# Altium PCB MainBoard4.PcbDoc
Units mm, origin at the board's own origin, x right, y up, seen from the top; angles counter-clockwise.
Board outline 135.12 x 80.25 mm, 2 copper layers (Top Layer, Bottom Layer); 81 components, 30 nets, 420 pads, 76 vias.
Unrouted connection lines stored in the file: 44.
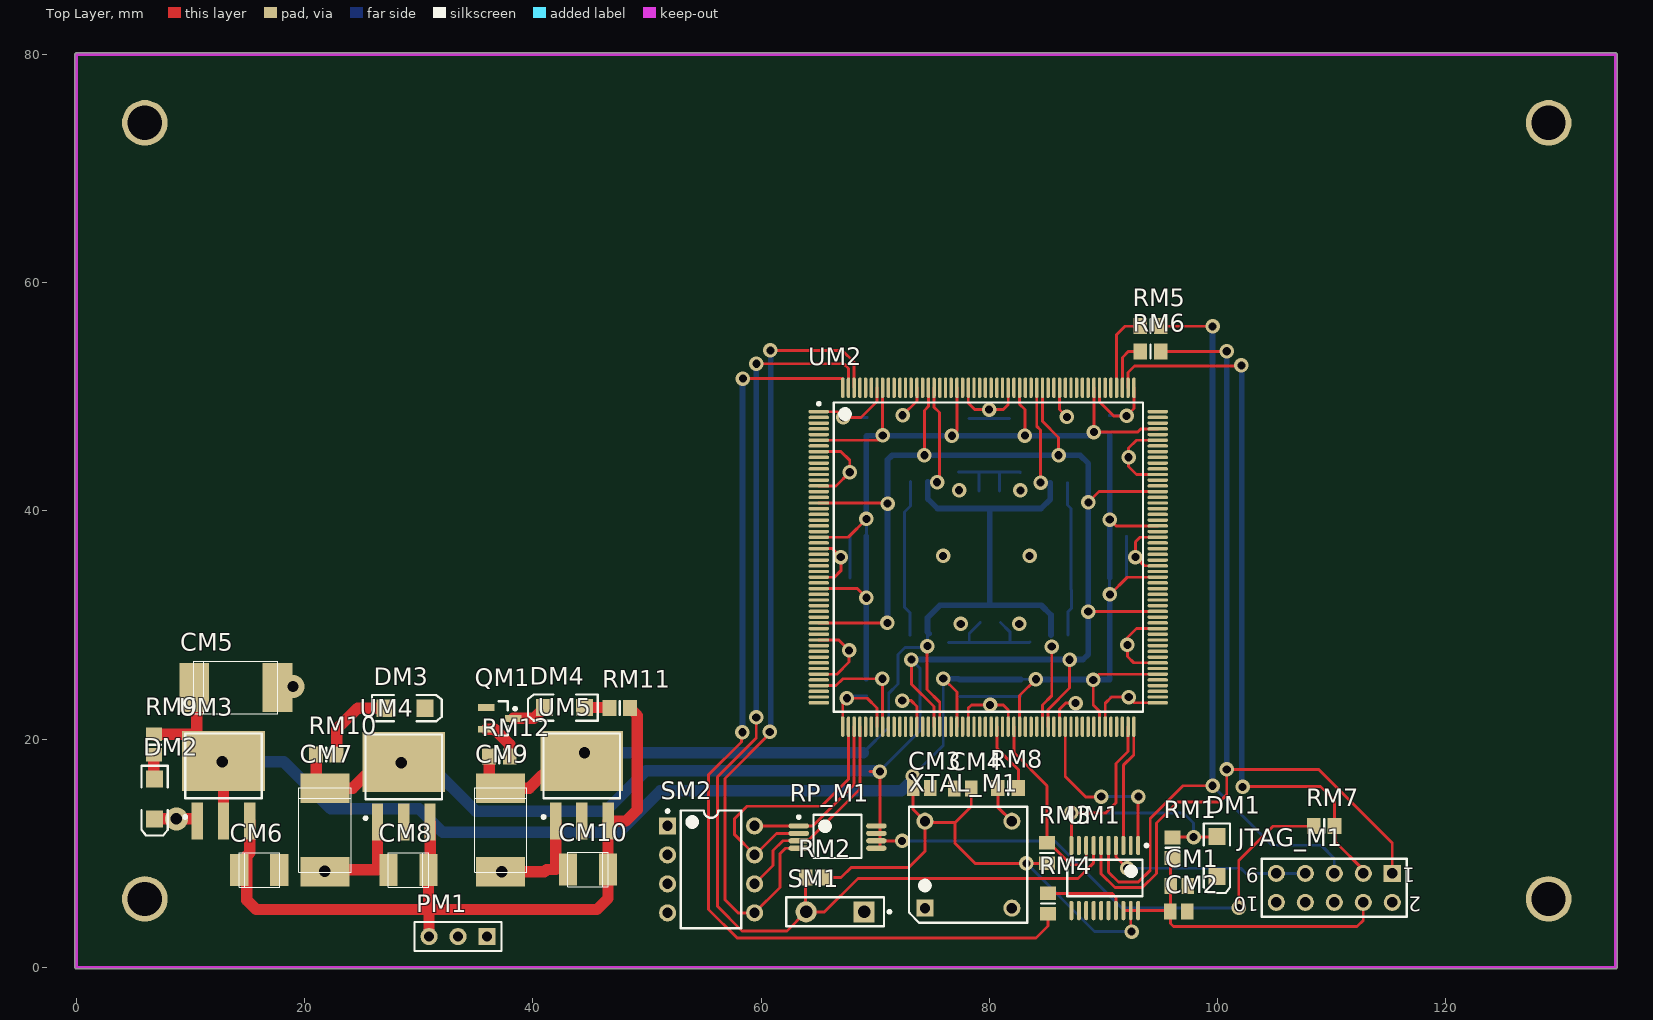
[diagram p0: Top Layer view]
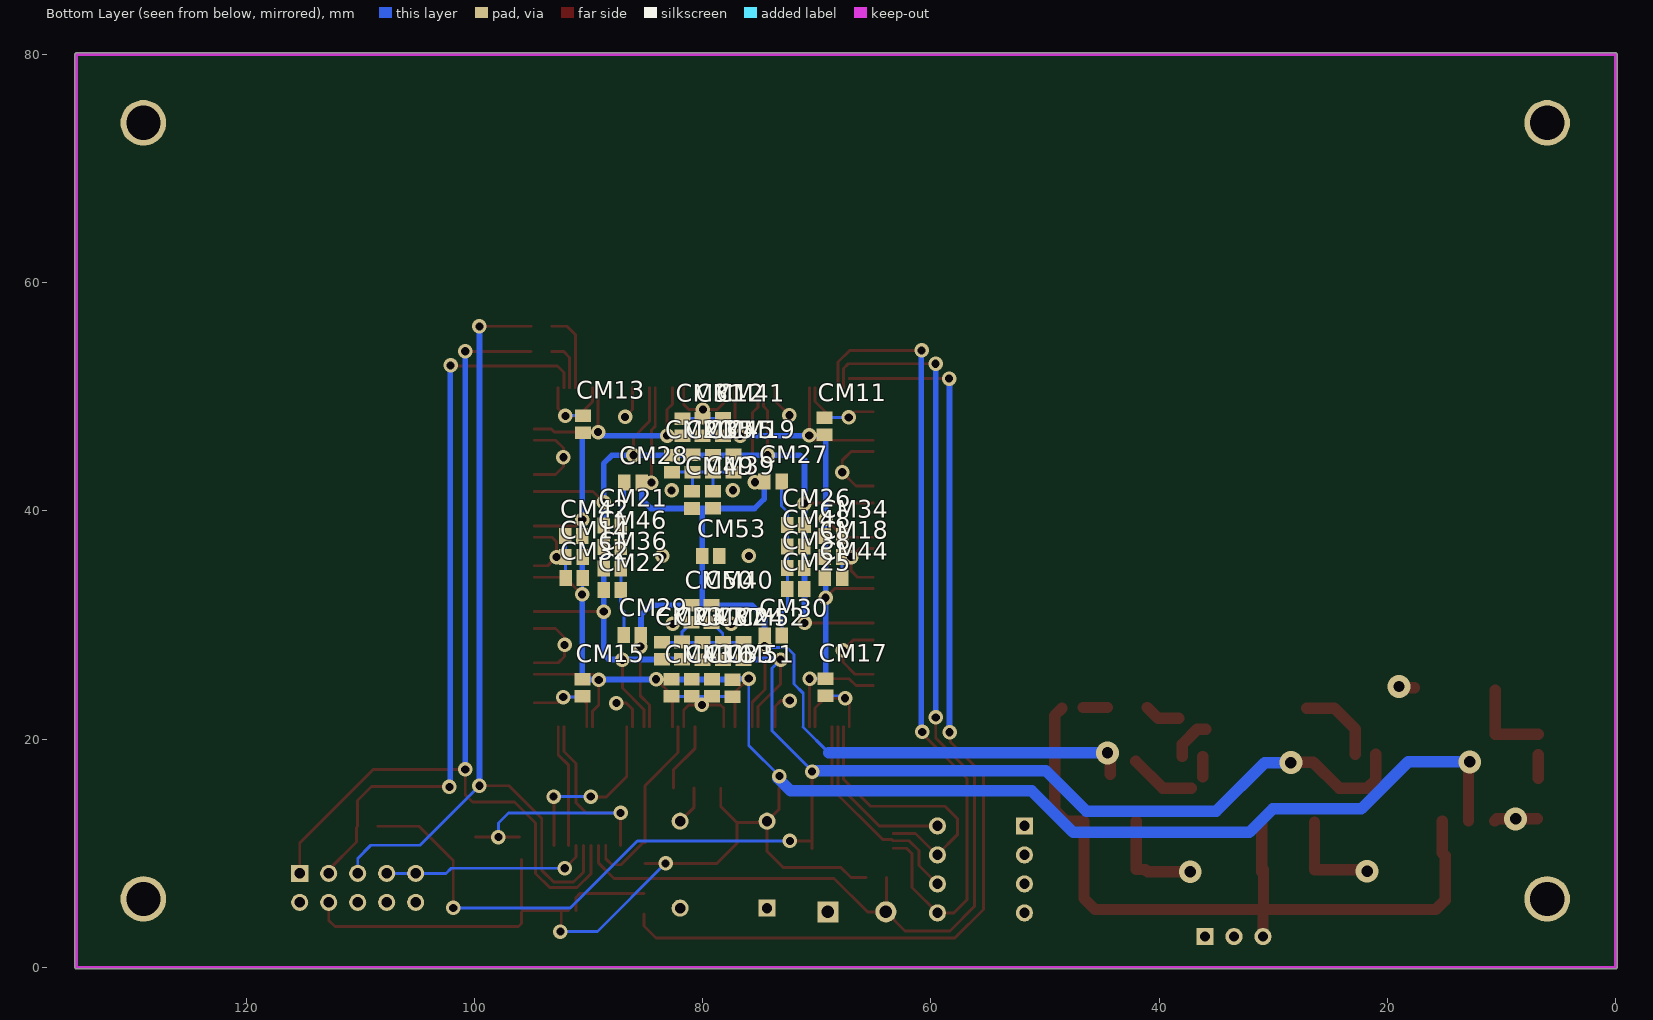
[diagram p1: Bottom Layer view, seen from below]

## Layer stack, top to bottom
Top Layer: signal copper 0.0356
Dielectric: dielectric 0.32, FR-4, Dk 4.8
Bottom Layer: signal copper 0.0356

## Board outline
0,-0.127 cw(c0,0) -0.127,0 -0.127,80 cw(c0,80) 0,80.127 134.87,80.127 cw(c134.87,80) 134.997,80 134.997,0 cw(c134.87,0) 134.87,-0.127

## Design rules (kind name [scope] priority, off if disabled: settings)
Clearance Clearance_1 [All] p1: gap=0.25
Clearance [All] p2 off: gap=0.25
PolygonConnect [All] p1: connectstyle=Relief reliefconductorwidth=0.254 reliefentries=4 polygonreliefangle="90 Angle" airgapwidth=0.254
RoutingVias [All] p1: holewidth=0.711 width=1.2 viastyle="Through Hole" minholewidth=0.711 minwidth=1.2 maxholewidth=1 maxwidth=2
SolderMaskExpansion [All] p1: expansion=0.102
Width [All] p1: maxlimit=0.254 minlimit=0.254 preferedwidth=0.254
28 further rules are at their usual default settings.

## Classes and differential pairs
component class Supply: CM5 CM6 CM7 CM8 CM9 CM10 DM2 DM3 DM4 PM1 QM1 RM9 RM10 RM11 RM12 U3 U4 U5 UM3 UM4 UM5
component class PowerGnd: CM11 CM12 CM13 CM14 CM15 CM16 CM17 CM18 CM19 CM20 CM21 CM22 CM23 CM24 CM25 CM26 CM27 CM28 CM29 CM30 CM31 CM32 CM33 CM34 CM35 CM36 CM37 CM38 CM39 CM40 CM41 CM42 CM43 CM44 CM45 CM46 CM47 CM48 CM49 CM50 CM51 CM52 CM53
component class BaseCircuit: CM1 CM2 CM3 CM4 DM1 JTAG_M1 RM1 RM2 RM3 RM4 RM5 RM6 RM7 RM8 RP_M1 SM1 SM2 U2 UM1 XTAL_M1
component class Banks: UM2

## Components (designator, comment, footprint, x,y, rotation, side; value= is the part's Value field where it differs from the comment)
CM1 "Cap" C0805 96.63,7.14 r180 top
CM2 "Cap" C0805 96.58,4.89 r180 top
CM3 "Cap" C0805 74.07,15.71 r180 top
CM4 "Cap" C0805 77.66,15.66 r0 top
CM5 "Cap Pol3" "SIZE D" 13.97,24.52 r0 top
CM6 "Cap Pol3" "SIZE B" 16.03,8.53 r0 top
CM7 "Cap Pol3" "SIZE D" 21.78,12.04 r270 top
CM8 "Cap Pol3" "SIZE B" 29.1,8.54 r180 top
CM9 "Cap Pol3" "SIZE D" 37.18,12.04 r270 top
CM10 "Cap Pol3" "SIZE B" 44.83,8.58 r180 top
CM11 "Cap" C0805 69.33,47.41 r270 bottom
CM12 "Cap" C0805 80,47.35 r270 bottom
CM13 "Cap" C0805 90.5,47.6 r270 bottom
CM14 "Cap" C0805 91.27,35.95 r180 bottom
CM15 "Cap" C0805 90.51,24.51 r90 bottom
CM16 "Cap" C0805 80.95,24.5 r90 bottom
CM17 "Cap" C0805 69.22,24.55 r90 bottom
CM18 "Cap" C0805 68.53,35.95 r0 bottom
CM19 "Cap" C0805 77.3,44.15 r90 bottom
CM20 "Cap" C0805 82.7,44.13 r90 bottom
CM21 "Cap" C0805 87.91,38.73 r0 bottom
CM22 "Cap" C0805 87.93,33.08 r0 bottom
CM23 "Cap" C0805 83.55,27.75 r270 bottom
CM24 "Cap" C0805 78.23,27.73 r270 bottom
CM25 "Cap" C0805 71.83,33.15 r180 bottom
CM26 "Cap" C0805 71.82,38.75 r180 bottom
CM27 "Cap" C0805 73.83,42.56 r0 bottom
CM28 "Cap" C0805 86.1,42.47 r180 bottom
CM29 "Cap" C0805 86.15,29.13 r180 bottom
CM30 "Cap" C0805 73.81,29.1 r0 bottom
CM31 "Cap" C0805 81.77,47.34 r270 bottom
CM32 "Cap" C0805 91.26,34.13 r180 bottom
CM33 "Cap" C0805 79.17,24.5 r90 bottom
CM34 "Cap" C0805 68.53,37.79 r0 bottom
CM35 "Cap" C0805 80.89,44.15 r90 bottom
CM36 "Cap" C0805 87.92,34.97 r0 bottom
CM37 "Cap" C0805 80,27.72 r270 bottom
CM38 "Cap" C0805 71.83,35.01 r180 bottom
CM39 "Cap" C0805 79.09,40.99 r270 bottom
CM40 "Cap" C0805 79.2,30.97 r90 bottom
CM41 "Cap" C0805 78.22,47.35 r270 bottom
CM42 "Cap" C0805 91.28,37.78 r180 bottom
CM43 "Cap" C0805 82.73,24.51 r90 bottom
CM44 "Cap" C0805 68.53,34.13 r0 bottom
CM45 "Cap" C0805 79.1,44.14 r90 bottom
CM46 "Cap" C0805 87.93,36.84 r0 bottom
CM47 "Cap" C0805 81.79,27.76 r270 bottom
CM48 "Cap" C0805 71.83,36.88 r180 bottom
CM49 "Cap" C0805 80.92,40.96 r270 bottom
CM50 "Cap" C0805 80.97,30.98 r90 bottom
CM51 "Cap" C0805 77.38,24.47 r90 bottom
CM52 "Cap" C0805 76.43,27.72 r270 bottom
CM53 "Cap" C0805 79.28,36.06 r0 bottom
DM1 "LED2" 3.2X1.6X1.1 99.93,9.71 r270 top
DM2 "LED2" 3.2X1.6X1.1 6.86,14.76 r270 top
DM3 "LED2" 3.2X1.6X1.1 28.81,22.71 r0 top
DM4 "LED2" 3.2X1.6X1.1 42.78,22.77 r180 top
JTAG_M1 "Header 5X2" HDR2X5 115.3,8.24 r180 top
PM1 "Header 3" HDR1X3 35.98,2.7 r180 top
QM1 "BC847B" SOT23_M 37.09,21.82 r0 top
RM1 "Res2" 6-0805_N 96.03,10.49 r270 top
RM2 "Res2" 6-0805_N 64.8,7.87 r0 top
RM3 "Res2" 6-0805_N 85.06,10.02 r270 top
RM4 "Res2" 6-0805_N 85.14,5.59 r90 top
RM5 "Res2" 6-0805_N 94.12,56.18 r180 top
RM6 "Res2" 6-0805_N 94.12,53.96 r180 top
RM7 "Res2" 6-0805_N 109.33,12.37 r180 top
RM8 "Res2" 6-0805_N 81.64,15.72 r0 top
RM9 "Res2" 6-0805_N 6.78,19.52 r270 top
RM10 "Res2" 6-0805_N 21.9,18.66 r0 top
RM11 "Res2" 6-0805_N 47.61,22.71 r0 top
RM12 "Res2" 6-0805_N 37.06,18.48 r0 top
RP_M1 "ResPack4" SSOP8 67.13,11.58 r0 top
SM1 "SW-PB" SPST-2 66.48,4.87 r180 top
SM2 "SW-DIP4" DIP-8 55.61,8.59 r0 top
UM1 "XCF04SVO20C" VO20_N 90.11,7.83 r270 top
UM2 "XC3S400-4PQ208C" PQ208_N 79.9,35.94 r0 top
UM3 "AMS1117-3V3" TO-252 12.88,16.14 r90 top
UM4 "AMS1117-2V5" TO-252 28.68,16.04 r90 top
UM5 "FAN1112" TO-252 44.28,16.14 r90 top
XTAL_M1 "XTAL_OSC" XTAL_HALF 78.16,9 r90 top

## Footprints (in the part's own frame and the unit in brackets; to place one, negate y for a bottom-side part, rotate by r counter-clockwise, add the part's x,y. Pads: shape width x height; smd on the part's side, far side on the other; paste and mask are expansions set on the pad)
3.2X1.6X1.1 [mm] "SMT LED; 2 Flat Leads"
  rect 1.5x1.5 smd: 1(-1.75,0) 2(1.75,0)
  silkscreen extent -2.9,-1.15 3.2,1.15
6-0805_N [mm] "Chip Resistor, Body 2.0x1.2mm, IPC Medium Density"
  rect 1.2x1.4 smd: 1(-0.9,0) 2(0.9,0)
  silkscreen extent 0,-0.6 0,0.6, body extent -1.07,-0.7 1.07,0.7, height 0.7
C0805 [mm] "Chip Capacitor, Body 2.0x1.3mm, IPC High Density"
  rect 1.1x1.4 smd: 1(-0.75,0) 2(0.75,0)
  body extent -1.1,-0.72 1.1,0.72, height 1.4
DIP-8 [mm] "DIP; 8 Leads; Row Spacing 7.62 mm; Pitch 2.54 mm"
  rect 1.5x1.5 hole 0.9: 1(-3.81,3.81)
  round 1.5 hole 0.9: 2(-3.81,1.27) 3(-3.81,-1.27) 4(-3.81,-3.81) 5(3.81,-3.81) 6(3.81,-1.27) 7(3.81,1.27) 8(3.81,3.81)
  silkscreen extent -3.93,-5.15 2.65,5.23, body extent -3.6,-5.15 3.6,5.15, height 5.08
HDR1X3 [mm] "Connector; Header; 3 Position"
  rect 1.5x1.5 hole 0.9: 1(0,0)
  round 1.5 hole 0.9: 2(2.54,0) 3(5.08,0)
  silkscreen extent -1.27,-1.27 6.35,1.27
HDR2X5 [mm] "Connector; Header; 5x2 Position"
  rect 1.5x1.5 hole 0.9: 1(0,0)
  round 1.5 hole 0.9: 2(0,2.54) 3(2.54,0) 4(2.54,2.54) 5(5.08,0) 6(5.08,2.54) 7(7.62,0) 8(7.62,2.54) 9(10.16,0) 10(10.16,2.54)
  silkscreen extent -1.27,-1.27 11.43,3.81
PQ208_N [mm] "Shrink QFP, 208-Leads, Body 28x28mm, Pitch 0.5mm, IPC Medium Density"
  oval 1.8x0.3 smd: 1(-14.85,12.75) 2(-14.85,12.25) 3(-14.85,11.75) 4(-14.85,11.25) 5(-14.85,10.75) 6(-14.85,10.25) 7(-14.85,9.75) 8(-14.85,9.25) 9(-14.85,8.75) 10(-14.85,8.25) 11(-14.85,7.75) 12(-14.85,7.25) 13(-14.85,6.75) 14(-14.85,6.25) 15(-14.85,5.75) 16(-14.85,5.25) 17(-14.85,4.75) 18(-14.85,4.25) 19(-14.85,3.75) 20(-14.85,3.25) 21(-14.85,2.75) 22(-14.85,2.25) 23(-14.85,1.75) 24(-14.85,1.25) 25(-14.85,0.75) 26(-14.85,0.25) 27(-14.85,-0.25) 28(-14.85,-0.75) 29(-14.85,-1.25) 30(-14.85,-1.75) 31(-14.85,-2.25) 32(-14.85,-2.75) 33(-14.85,-3.25) 34(-14.85,-3.75) 35(-14.85,-4.25) 36(-14.85,-4.75) 37(-14.85,-5.25) 38(-14.85,-5.75) 39(-14.85,-6.25) 40(-14.85,-6.75) 41(-14.85,-7.25) 42(-14.85,-7.75) 43(-14.85,-8.25) 44(-14.85,-8.75) 45(-14.85,-9.25) 46(-14.85,-9.75) 47(-14.85,-10.25) 48(-14.85,-10.75) 49(-14.85,-11.25) 50(-14.85,-11.75) 51(-14.85,-12.25) 52(-14.85,-12.75) 105(14.85,-12.75) 106(14.85,-12.25) 107(14.85,-11.75) 108(14.85,-11.25) 109(14.85,-10.75) 110(14.85,-10.25) 111(14.85,-9.75) 112(14.85,-9.25) 113(14.85,-8.75) 114(14.85,-8.25) 115(14.85,-7.75) 116(14.85,-7.25) 117(14.85,-6.75) 118(14.85,-6.25) 119(14.85,-5.75) 120(14.85,-5.25) 121(14.85,-4.75) 122(14.85,-4.25) 123(14.85,-3.75) 124(14.85,-3.25) 125(14.85,-2.75) 126(14.85,-2.25) 127(14.85,-1.75) 128(14.85,-1.25) 129(14.85,-0.75) 130(14.85,-0.25) 131(14.85,0.25) 132(14.85,0.75) 133(14.85,1.25) 134(14.85,1.75) 135(14.85,2.25) 136(14.85,2.75) 137(14.85,3.25) 138(14.85,3.75) 139(14.85,4.25) 140(14.85,4.75) 141(14.85,5.25) 142(14.85,5.75) 143(14.85,6.25) 144(14.85,6.75) 145(14.85,7.25) 146(14.85,7.75) 147(14.85,8.25) 148(14.85,8.75) 149(14.85,9.25) 150(14.85,9.75) 151(14.85,10.25) 152(14.85,10.75) 153(14.85,11.25) 154(14.85,11.75) 155(14.85,12.25) 156(14.85,12.75)
  oval 0.3x1.8 smd: 53(-12.75,-14.85) 54(-12.25,-14.85) 55(-11.75,-14.85) 56(-11.25,-14.85) 57(-10.75,-14.85) 58(-10.25,-14.85) 59(-9.75,-14.85) 60(-9.25,-14.85) 61(-8.75,-14.85) 62(-8.25,-14.85) 63(-7.75,-14.85) 64(-7.25,-14.85) 65(-6.75,-14.85) 66(-6.25,-14.85) 67(-5.75,-14.85) 68(-5.25,-14.85) 69(-4.75,-14.85) 70(-4.25,-14.85) 71(-3.75,-14.85) 72(-3.25,-14.85) 73(-2.75,-14.85) 74(-2.25,-14.85) 75(-1.75,-14.85) 76(-1.25,-14.85) 77(-0.75,-14.85) 78(-0.25,-14.85) 79(0.25,-14.85) 80(0.75,-14.85) 81(1.25,-14.85) 82(1.75,-14.85) 83(2.25,-14.85) 84(2.75,-14.85) 85(3.25,-14.85) 86(3.75,-14.85) 87(4.25,-14.85) 88(4.75,-14.85) 89(5.25,-14.85) 90(5.75,-14.85) 91(6.25,-14.85) 92(6.75,-14.85) 93(7.25,-14.85) 94(7.75,-14.85) 95(8.25,-14.85) 96(8.75,-14.85) 97(9.25,-14.85) 98(9.75,-14.85) 99(10.25,-14.85) 100(10.75,-14.85) 101(11.25,-14.85) 102(11.75,-14.85) 103(12.25,-14.85) 104(12.75,-14.85) 157(12.75,14.85) 158(12.25,14.85) 159(11.75,14.85) 160(11.25,14.85) 161(10.75,14.85) 162(10.25,14.85) 163(9.75,14.85) 164(9.25,14.85) 165(8.75,14.85) 166(8.25,14.85) 167(7.75,14.85) 168(7.25,14.85) 169(6.75,14.85) 170(6.25,14.85) 171(5.75,14.85) 172(5.25,14.85) 173(4.75,14.85) 174(4.25,14.85) 175(3.75,14.85) 176(3.25,14.85) 177(2.75,14.85) 178(2.25,14.85) 179(1.75,14.85) 180(1.25,14.85) 181(0.75,14.85) 182(0.25,14.85) 183(-0.25,14.85) 184(-0.75,14.85) 185(-1.25,14.85) 186(-1.75,14.85) 187(-2.25,14.85) 188(-2.75,14.85) 189(-3.25,14.85) 190(-3.75,14.85) 191(-4.25,14.85) 192(-4.75,14.85) 193(-5.25,14.85) 194(-5.75,14.85) 195(-6.25,14.85) 196(-6.75,14.85) 197(-7.25,14.85) 198(-7.75,14.85) 199(-8.25,14.85) 200(-8.75,14.85) 201(-9.25,14.85) 202(-9.75,14.85) 203(-10.25,14.85) 204(-10.75,14.85) 205(-11.25,14.85) 206(-11.75,14.85) 207(-12.25,14.85) 208(-12.75,14.85)
  silkscreen extent -14.97,-13.55 13.55,13.57, body extent -14,-14 14,14, height 4.1
"SIZE B" [mm] "Size B SMD tantalium capacitor"
  rect 1.6x2.8 smd: 1(-1.75,0) 2(1.75,0)
  silkscreen extent -1.78,-1.52 1.78,1.52, body extent -1.71,-1.52 1.71,1.52, height 1.3
"SIZE D" [mm] "Size D SMD tantalium capacitor"
  rect 2.6x4.3 smd: 1(-3.65,0) 2(3.65,0)
  silkscreen extent -3.68,-2.29 3.68,2.29, body extent -3.68,-2.29 3.68,2.29, height 1.3
SOT23_M [mm] "SOT23, 3-Leads, Body 2.9x1.3mm, Pitch 0.95mm, Lead Span 2.3mm - Reverse Pinning, IPC Low Density"
  rect 1.45x0.6 smd: 1(1.175,0) 2(-1.175,-0.95) 3(-1.175,0.95)
  silkscreen extent -0.1,-1.5 1.48,1.5, body extent -0.7,-1.5 0.7,1.5, height 1.1
SPST-2 [mm] "Switch; 2 Leads"
  rect 1.85x1.85 hole 1.1: 1(-2.54,0)
  round 1.85 hole 1.1: 2(2.54,0)
  silkscreen extent -4.89,-1.27 4.28,1.27
SSOP8 [mm]
  oval 1.8x0.45 smd: 1(-3.835,0.814) 2(-3.835,0.164) 3(-3.835,-0.486) 4(-3.835,-1.136) 5(2.965,-1.136) 6(2.965,-0.486) 7(2.965,0.164) 8(2.965,0.814)
  silkscreen extent -3.96,-2 1.67,1.79, body extent -3.14,-1.96 2.26,1.79, height 2
TO-252 [mm]
  rect 3.25x1 smd: 1(-3.309,2.292) 2(-3.309,-0.008) 3(-3.309,-2.308)
  rect 5.25x7.25 smd: 4(1.941,-0.008)
  silkscreen extent -3.09,-3.36 4.36,3.47, body extent -1.86,-3.82 4.87,3.8, height 1.7
VO20_N [mm] "TSOP, 20-Leads, Body 6.5x4.4mm, Pitch 0.65mm, IPC Medium Density"
  oval 1.7x0.35 smd: 1(-2.85,2.925) 2(-2.85,2.275) 3(-2.85,1.625) 4(-2.85,0.975) 5(-2.85,0.325) 6(-2.85,-0.325) 7(-2.85,-0.975) 8(-2.85,-1.625) 9(-2.85,-2.275) 10(-2.85,-2.925) 11(2.85,-2.925) 12(2.85,-2.275) 13(2.85,-1.625) 14(2.85,-0.975) 15(2.85,-0.325) 16(2.85,0.325) 17(2.85,0.975) 18(2.85,1.625) 19(2.85,2.275) 20(2.85,2.925)
  silkscreen extent -2.97,-3.3 1.6,3.78, body extent -2.25,-3.3 2.25,3.3, height 1.2
XTAL_HALF [mm] "NTK XTAL Oscillator Half size (qubic)"
  rect 1.5x1.5 hole 0.9: 1(-3.81,3.81)
  round 1.5 hole 0.9: 2(-3.81,-3.81) 3(3.81,-3.81) 4(3.81,3.81)
  silkscreen extent -5.08,-5.15 5.08,5.21, body extent -5.08,-5.15 5.08,5.15, height 5.08

## Part data
CM1 CM2 CM3 CM4 CM11 CM12 CM13 CM14 CM15 CM16 CM17 CM18 CM19 CM20 CM21 CM22 CM23 CM24 CM25 CM26 CM27 CM28 CM29 CM30 CM31 CM32 CM33 CM34 CM35 CM36 CM37 CM38 CM39 CM40 CM41 CM42 CM43 CM44 CM45 CM46 CM47 CM48 CM49 CM50 CM51 CM52 CM53: "Capacitor"
CM5 CM6 CM7 CM8 CM9 CM10: "Polarized Capacitor (Surface Mount)"
DM1 DM2 DM3 DM4: "Typical RED, GREEN, YELLOW, AMBER GaAs LED"
JTAG_M1: "Header, 5-Pin, Dual row"
PM1: "Header, 3-Pin"
QM1: library part NPN, "NPN Bipolar Transistor"
RM1 RM2 RM3 RM4 RM5 RM6 RM7 RM8 RM9 RM10 RM11 RM12: "Resistor"
SM1: "Switch"
SM2: "DIP Switch"
UM1: "XCF00S Series, Platform Flash In-System Programmable Configuration 3.3V PROM, 20-Pin TSOP, 4-Megabit, Commercial Grade"
UM2: "Spartan-3 1.2V FPGA, 141 User I/Os, 208-Pin PQFP, Standard Performance, Commercial Grade"
UM3 UM4 UM5: library part AMS1117-3.3V

## Free pads (board coordinates)
  round 4 hole 3: 0(6,6) 0(6,74) 0(129,6) 0(129,74)

## Via types
v1: diameter 1.27, hole 0.711, Top Layer to Bottom Layer, 69 vias
v2: diameter 2, hole 1, Top Layer to Bottom Layer, 7 vias

## Nets (pads, with @x,y where several pads share a name; then routed paths per layer and width w, separated by ;. In a path a pad name is that pad's centre, name@x,y a point inside that pad or via, vN(x,y) a via of type N, cw(c..) or ccw(c..) an arc to the next point about the centre after c; other vN are vias at no path point)
1V2: CM9.1 CM27.2 CM28.2 CM29.2 CM30.2 CM39.2 CM40.2 CM49.2 CM50.2 CM53.2 RM12.1 UM2.70 UM2.88 UM2.174 UM2.192 UM5.2 UM5.4 | length 117.7
  Top Layer w0.254: v1@74.54,27.8 74.54,24.35 75.65,23.24 UM2.70 ; UM2.192 75.15,49.08 75.62,48.61 75.62,42.71 v1(75.42,42.51) ; UM2.174 84.15,47.41 84.48,47.08 v1(84.48,42.48) ; UM2.88 84.65,22.99 85.46,23.8 v1(85.46,28.11)
  Top Layer w1: CM9.1@36.16,16.71 RM12.1 ; CM9.1 39.67,15.69 UM5.4@42.061,18.081 ; UM5.4@44.288,16.94 UM5.4
  Bottom Layer w0.254: 68.95,18.812 71.21,21.072 ; 71.18,21.142 71.18,24.02 71.98,24.82 71.98,27.41 72.593,28.023 74.433,28.023 v1(74.56,28.15) CM30.2 ; CM27.2@74.61,42.55 74.59,42.55 CM27.2 v1@75.37,42.56 ; v1(84.48,42.48) 85.33,42.48 CM28.2@85.34,42.47
  Bottom Layer w0.5: CM27.2@74.61,42.55 74.61,41.05 75.45,40.21 CM39.2@79.09,40.21 ; CM30.2@74.705,29.245 74.57,29.38 74.57,30.64 75.66,31.73 CM50.2 84.55,31.73 85.39,30.89 CM29.2@85.39,29.13 ; CM39.2 79.12,40.21 CM49.2 84.53,40.21 85.34,41.02 CM28.2@85.34,42.47 ; 80.03,31.78 CM53.2 80.03,40.12
  Bottom Layer w1: v2@44.44,18.79 68.95,18.812
  other v2: 44.52,18.8
2V5: CM7.1 CM19.2 CM20.2 CM21.2 CM22.2 CM23.2 CM24.2 CM25.2 CM26.2 CM35.2 CM36.2 CM37.2 CM38.2 CM45.2 CM46.2 CM47.2 CM48.2 CM52.2 RM7.2 RM10.1 RP_M1.5 RP_M1.6 RP_M1.7 RP_M1.8 UM2.17 UM2.38 UM2.69 UM2.89 UM2.121 UM2.142 UM2.173 UM2.193 UM4.2 UM4.4 | length 236.4
  Top Layer w0.25: 69.53,17.16 70.4,17.16 RP_M1.5@70.4,10.42
  Top Layer w0.254: UM2.38 v1(71.06,30.19) ; UM2.17 71.03,40.69 v1(71.08,40.64) ; RP_M1.6@70.65,11.08 v1(72.35,11.08) ; v1(73.16,26.97) 73.16,24.84 75.15,22.85 UM2.69 ; v1(74.31,44.88) 74.31,48.8 74.65,49.14 UM2.193 ; UM2.173 84.65,47.85 86.06,46.44 v1(86.06,44.88) ; UM2.89 85.15,22.59 87.03,24.47 v1(87.03,26.96) ; v1(88.66,31.18) 88.67,31.19 UM2.121 ; v1(88.67,40.75) 89.61,41.69 UM2.142 ; v1(101.85,5.21) 101.85,9.37 104.85,12.37 RM7.2
  Top Layer w1: RM10.1 21,16.47 CM7.1 24.2,15.69 26.491,17.981 UM4.4 UM4.4@28.688,17.94
  Bottom Layer w0.254: v1@70.41,17.23 71.27,18.09 73.92,20.74 73.92,26.21 v1(73.16,26.97) ; v1(72.35,11.08) 85.72,11.08 91.59,5.21 v1(101.85,5.21)
  Bottom Layer w0.5: v1@71.08,30.19 CM25.2 CM38.2 CM48.2 v1(71.08,40.64) 71.08,44.48 71.48,44.88 CM20.2 87.95,44.88 88.67,44.16 v1(88.67,40.75) ; v1(73.16,26.97) CM52.2 CM37.2 88.2,26.97 88.66,27.43 v1(88.66,31.18) CM21.2 v1@88.66,40.75
  Bottom Layer w1: v2(28.45,17.94) 30.75,17.94 35.01,13.68 46.37,13.68 49.92,17.23 v1@70.41,17.23
  other v1: 70.41,17.16
3V3: CM1.2 CM2.2 CM3.2 CM4.2 CM5.1 CM11.2 CM12.2 CM13.2 CM14.2 CM15.2 CM16.2 CM17.2 CM18.2 CM31.2 CM32.2 CM33.2 CM34.2 CM41.2 CM42.2 CM43.2 CM44.2 CM51.2 JTAG_M1.4 RM1.2 RM2.2 RM3.2 RM9.1 UM1.18 UM1.19 UM1.20 UM2.6 UM2.23 UM2.32 UM2.49 UM2.60 UM2.73 UM2.84 UM2.98 UM2.110 UM2.127 UM2.136 UM2.153 UM2.164 UM2.177 UM2.188 UM2.201 UM3.2 UM3.4 XTAL_M1.4 | length 320.7
  Top Layer w0.254: UM2.49 66.57,24.69 67.17,25.29 v1(70.62,25.29) 70.65,25.26 UM2.60 ; UM2.32 68.42,33.19 v1(69.22,32.39) ; UM2.23 67.63,37.69 v1(69.23,39.29) ; UM2.6 70.21,46.19 70.65,46.63 UM2.201 ; RM2.2 67.01,7.87 67.89,8.75 72.93,8.75 74.35,10.17 XTAL_M1.4 ; CM3.2 73.32,13.84 XTAL_M1.4 ; XTAL_M1.4@73.85,12.81 XTAL_M1.4 ; v1(75.96,25.31) 77.15,24.12 UM2.73 ; v1(76.72,46.58) 77.15,47.01 UM2.188 ; CM4.2 78.41,14.1 77,12.69 ; UM2.84 82.65,23.82 v1(84.08,25.25) ; UM2.177 82.65,49.35 83.11,48.89 v1(83.11,46.59) ; RM3.2 v1(83.24,9.12) 78.73,9.12 77,10.85 77,12.69 ; UM2.164 v1(89.15,46.91) 93,46.91 93.28,47.19 UM2.153 ; UM2.98 89.65,22.44 89.1,22.99 v1(89.1,25.19) 89.6,25.69 UM2.110 ; v1(90.55,39.23) 91.09,38.69 UM2.136 ; v1(90.56,32.68) 92.07,34.19 UM2.127 ; UM1.18 UM1.19 ; v1(92.46,3.14) 92.385,3.215 UM1.19 ; CM2.2 95.86,4.86 95.86,3.84 96.12,3.58 112.22,3.58 112.76,4.12 JTAG_M1.4 ; RM1.2@95.88,9.44 CM1.2 95.88,5.12 95.74,4.98 UM1.20 UM1.19 ; XTAL_M1.4 74.47,12.69 77,12.69
  Top Layer w1: RM9.1 10.549,20.42 CM5.1@10.549,24.291 ; UM3.2 UM3.4@12.888,18.01
  Bottom Layer w0.254: CM17.2 69.23,25.29 v1(70.62,25.29) v1@70.61,25.3 ; CM34.2@69.22,37.79 69.22,39.28 v1(69.23,39.29) ; v1(73.27,16.76) 75.96,19.45 v1(75.96,25.31) ; CM31.2 v1(83.11,46.59) ; CM43.2@82.74,25.25 v1(84.08,25.25) ; v1(83.24,9.12) 89.22,3.14 v1(92.46,3.14) ; v1(89.15,46.91) 89.21,46.85 CM13.2 ; CM32.2@90.54,34.13 90.54,32.7 v1(90.56,32.68) ; v1@90.54,39.22 v1(90.55,39.23)
  Bottom Layer w0.5: CM17.2 v1(69.22,32.39) CM34.2@69.22,37.79 ; v1@69.22,39.28 69.22,46.55 69.26,46.59 v1@89.15,46.59 ; v1@75.97,25.3 77.3,25.3 CM51.2 CM43.2@82.74,25.22 ; v1@84.08,25.22 v1@89.1,25.22 ; v1@89.13,25.22 90.54,25.22 v1@90.54,32.7 ; CM32.2@90.54,34.13 90.54,39.22 CM13.2@90.54,46.81
  Bottom Layer w1: v2(12.78,18.01) 18.17,18.01 22.29,13.89 30.04,13.89 32.1,11.83 47.52,11.83 51.17,15.48 72.3,15.48 v1@73.41,16.59
  other v1: 70.66,46.62
5V: CM6.1 CM8.1 CM10.1 PM1.3 RM11.2 UM3.3 UM4.3 UM5.3 | length 68.6
  Top Layer w1: UM3.3 15.188,10.028 14.93,9.77 14.93,5.9 15.76,5.07 26.34,5.07 30.77,5.07 ; 30.85,5.07 CM8.1 31.02,8.37 UM4.3@31.02,12.699 ; PM1.3 30.9,5.02 ; 30.9,5.07 45.61,5.07 46.58,6.04 CM10.1 UM5.3@46.58,12.823 ; UM5.3 48.161,12.831 49.16,13.83 49.16,22.06 RM11.2
12V: PM1.2
GND: CM1.1 CM2.1 CM3.1 CM4.1 CM5.2 CM6.2 CM7.2 CM8.2 CM9.2 CM10.2 CM11.1 CM12.1 CM13.1 CM14.1 CM15.1 CM16.1 CM17.1 CM18.1 CM19.1 CM20.1 CM21.1 CM22.1 CM23.1 CM24.1 CM25.1 CM26.1 CM27.1 CM28.1 CM29.1 CM30.1 CM31.1 CM32.1 CM33.1 CM34.1 CM35.1 CM36.1 CM37.1 CM38.1 CM39.1 CM40.1 CM41.1 CM42.1 CM43.1 CM44.1 CM45.1 CM46.1 CM47.1 CM48.1 CM49.1 CM50.1 CM51.1 CM52.1 CM53.1 DM1.2 DM2.2 DM3.2 JTAG_M1.2 JTAG_M1.10 PM1.1 QM1.3 SM1.1 SM2.1 SM2.2 SM2.3 SM2.4 UM1.11 UM2.1 UM2.8 UM2.14 UM2.25 UM2.30 UM2.41 UM2.47 UM2.53 UM2.59 UM2.66 UM2.75 UM2.82 UM2.91 UM2.99 UM2.105 UM2.112 UM2.118 UM2.129 UM2.134 UM2.145 UM2.151 UM2.157 UM2.163 UM2.170 UM2.179 UM2.186 UM2.195 UM2.202 UM3.1 UM4.1 UM5.1 XTAL_M1.2 | length 188.6
  Top Layer w0.254: UM2.47 66.65,25.69 67.71,26.75 v1(67.71,27.78) 66.8,28.69 UM2.41 ; UM2.30 66.42,34.19 66.98,34.75 v1(66.98,35.95) 66.24,36.69 UM2.25 ; UM2.14 66.56,42.19 v1(67.76,43.39) 67.76,44.44 67.01,45.19 UM2.8 ; UM2.1 66.69,48.69 v1(67.19,48.19) 68.75,48.19 70.15,49.59 UM2.202 ; UM2.53 67.15,23.21 v1(67.52,23.58) 69.29,23.58 70.15,22.72 UM2.59 ; v1(72.36,23.37) 73.15,23.37 73.65,22.87 UM2.66 ; v1(72.39,48.38) 73.65,49.64 UM2.195 ; UM2.75 78.15,22.73 78.42,23 v1(80.06,23) 81.21,23 81.65,22.56 UM2.82 ; UM2.186 78.15,49.45 78.73,48.87 v1(79.97,48.87) 81.19,48.87 81.65,49.33 UM2.179 ; UM2.91 86.15,22.62 86.69,23.16 v1(87.55,23.16) ; UM2.170 86.15,48.88 v1(86.79,48.24) ; UM2.163 89.65,49.57 90.9,48.32 v1(92.02,48.32) 92.677,48.977 UM2.157@92.677,50.79 ; UM2.99 90.15,23.14 90.69,23.68 v1(92.21,23.68) 92.7,23.19 UM2.105 ; UM2.112 92.65,26.69 92.1,27.24 v1(92.1,28.25) 92.1,28.9 92.89,29.69 UM2.118 ; UM2.129 93.56,35.19 v1(92.8,35.95) 92.8,37.29 93.2,37.69 UM2.134 ; UM2.145 92.88,43.19 92.19,43.88 v1(92.19,44.7) 92.19,45.5 92.88,46.19 UM2.151
  Top Layer w1: DM2.2 v2(8.76,13.01) 10.409,13.01 UM3.1 ; CM5.2 18.89,24.52 v2(18.98,24.61) ; CM7.2@21.78,8.56 21.8,8.54 26.388,8.54 ; 26.388,8.602 UM4.1 ; CM9.2 41.01,8.39 41.2,8.58 41.988,8.58 ; 41.988,8.608 UM5.1
  Bottom Layer w0.254: v1(67.19,48.19) CM11.1@69.3,48.19 ; v1(67.52,23.58) 67.74,23.8 CM17.1 ; CM44.1 CM18.1 CM34.1 ; CM30.1 73.06,31.06 72.57,31.55 CM26.1 72.57,39.91 73.08,40.42 CM27.1 ; CM52.1 CM37.1 CM47.1@81.79,28.47 ; CM19.1 CM45.1@79.1,43.4 ; CM51.1 82.69,23.72 CM43.1 ; CM41.1 CM12.1 81.76,48.1 CM31.1 ; CM24.1 78.23,29.25 CM40.1 ; CM39.1 79.09,43.39 CM45.1@79.1,43.4 ; CM49.1@80.89,41.74 CM35.1 ; CM50.1 81.79,29.41 CM47.1 CM47.1@81.79,28.47 ; CM20.1 82.68,43.4 CM35.1 ; CM23.1 83.52,28.47 CM47.1@81.79,28.47 ; CM28.1 86.85,40.52 87.16,40.21 CM21.1 87.16,33.1 CM22.1 87.18,31.45 86.9,31.17 CM29.1 ; CM13.1 91.99,48.35 v1(92.02,48.32) ; CM15.1@90.59,23.68 v1(92.21,23.68) ; CM32.1 92.03,34.15 CM42.1 ; CM45.1@79.1,43.4 CM35.1
  other v2: 37.27,8.38 21.78,8.42
NetDM1_1: DM1.1 RM1.1 UM1.10 UM2.103 | length 30.4
  Top Layer w0.254: UM1.10 87.185,13.525 v1(87.19,13.53) 90.2,13.53 91.1,14.43 91.1,17.87 92.15,18.92 UM2.103 ; RM1.1@96.06,11.42 v1(97.89,11.42) DM1.1@99.89,11.42
  Bottom Layer w0.254: v1(87.19,13.53) 97.02,13.53 97.89,12.66 v1(97.89,11.42)
NetDM2_1: DM2.1 RM9.2 | length 2
  Top Layer w1: DM2.1@6.78,16.59 RM9.2
NetDM3_1: DM3.1 RM10.2 | length 7.2
  Top Layer w1: RM10.2 22.8,20.87 24.64,22.71 DM3.1
NetDM4_1: DM4.1 RM11.1 | length 2.1
  Top Layer w1: DM4.1 RM11.1@46.65,22.77
NetDM4_2: DM4.2 QM1.1 | length 3.2
  Top Layer w1: QM1.1 40.08,21.82 DM4.2
NetJTAG_M1_1: JTAG_M1.1 RM6.1 UM1.6 | length 84.4
  Top Layer w0.254: UM1.6 89.785,8.205 91,6.99 93.4,6.99 94.63,8.22 94.63,12.64 96.47,14.48 100.16,14.48 100.8,15.12 v1(100.8,17.35) 108.86,17.35 115.3,10.91 JTAG_M1.1 ; RM6.1 100.77,53.96 v1(100.8,53.99)
  Bottom Layer w0.5: v1(100.8,17.35) v1(100.8,53.99)
NetJTAG_M1_3: JTAG_M1.3 RM7.1 UM2.158 | length 65.9
  Top Layer w0.254: UM2.158 92.15,52.13 92.71,52.69 102.42,52.69 102.36,52.75 v1(102.08,52.75) ; v1(102.19,15.82) 102.21,15.84 109.01,15.84 110.23,14.62 RM7.1 110.33,12.27 110.33,10.99 112.76,8.56 JTAG_M1.3
  Bottom Layer w0.254: v1(102.08,52.75) 102.36,52.75 v1@102.12,52.51 ; v1@102.12,16.16 102.44,15.84 102.42,15.82 v1(102.19,15.82)
  Bottom Layer w0.5: v1@102.12,16.16 v1@102.12,52.51
NetJTAG_M1_5: JTAG_M1.5 RM5.1 UM1.5 | length 77.4
  Top Layer w0.254: UM1.5 90.435,8.345 91.3,7.48 93.05,7.48 94.09,8.52 94.09,13.04 96.97,15.92 v1(99.55,15.92) ; RM5.1 99.54,56.18 v1(99.55,56.17)
  Bottom Layer w0.254: v1(99.55,15.92) 104.77,10.7 109.07,10.7 110.22,9.55 JTAG_M1.5
  Bottom Layer w0.5: v1(99.55,15.92) v1(99.55,56.17)
NetJTAG_M1_7: JTAG_M1.7 JTAG_M1.9 UM1.4 | length 18.2
  Top Layer w0.254: UM1.4 91.085,9.675 92.07,8.69 v1(92.08,8.69)
  Bottom Layer w0.254: v1(92.08,8.69) 102.03,8.69 102.48,8.24 JTAG_M1.9 JTAG_M1.7
NetQM1_2: QM1.2 RM12.2 | length 3.7
  Top Layer w1: QM1.2 36.65,20.87 37.96,19.56 RM12.2
NetRM2_1: RM2.1 SM1.2 UM1.7 UM2.207 | length 99.7
  Top Layer w0.254: v1(59.57,21.91) 59.57,20.1 56.17,16.7 56.17,5.35 58.33,3.19 62.26,3.19 SM1.2 65.56,4.87 68.48,7.79 87.75,7.79 89.135,9.175 UM1.7 ; v1(59.58,52.89) 67.24,52.89 67.65,52.48 UM2.207 ; SM1.2@63.9,4.91 RM2.1
  Bottom Layer w0.5: v1@59.58,21.92 v1(59.58,52.89)
NetRM3_1: RM3.1 UM1.8 UM2.83 | length 16.8
  Top Layer w0.254: UM2.83 82.15,18.82 85.06,15.91 RM3.1 ; RM3.1@85.22,10.92 87.15,8.99 87.95,8.99 88.485,9.525 UM1.8
NetRM4_1: RM4.1 UM2.208 | length 88.7
  Top Layer w0.254: v1@58.28,20.52 58.28,19.76 55.4,16.88 55.4,5.08 57.91,2.57 84.09,2.57 85.14,3.62 RM4.1 ; v1(58.4,51.59) UM2.208@67.15,51.59
  Bottom Layer w0.5: v1(58.36,20.6) v1@58.36,51.59
NetRM4_2: RM4.2 UM1.17 | length 7.2
  Top Layer w0.254: RM4.2 90.72,6.49 91.085,6.125 UM1.17
NetRM5_2: RM5.2 UM2.160 | length 7
  Top Layer w0.254: UM2.160 91.15,55.46 91.87,56.18 RM5.2
NetRM6_2: RM6.2 UM2.159 | length 4.4
  Top Layer w0.254: UM2.159 91.65,53.45 92.16,53.96 RM6.2
NetRM8_1: RM8.1 XTAL_M1.3 | length 3.4
  Top Layer w0.254: RM8.1 80.74,14.04 XTAL_M1.3
NetRM8_2: RM8.2 UM2.80 | length 6.2
  Top Layer w0.254: UM2.80 80.65,19.21 82.54,17.32 RM8.2
NetRP_M1_1: RP_M1.1 SM2.8 UM2.55 | length 15.3
  Top Layer w0.254: SM2.8@59.426,12.394 RP_M1.1 64.524,12.394 68.15,16.02 UM2.55
NetRP_M1_2: RP_M1.2 SM2.7 UM2.54 | length 24.6
  Top Layer w0.254: RP_M1.2 61.334,11.744 59.45,9.86 57.65,11.66 57.65,13 58.77,14.12 65.29,14.12 67.65,16.48 UM2.54
NetRP_M1_3: RP_M1.3 SM2.6 UM2.56 | length 18.9
  Top Layer w0.254: SM2.6 61.04,8.94 61.04,10.23 61.904,11.094 RP_M1.3 63.393,11.192 64.199,11.192 68.65,15.643 UM2.56
NetRP_M1_4: RP_M1.4 SM2.5 UM2.206 | length 71.7
  Top Layer w0.254: v1(60.75,20.64) 60.91,20.64 56.82,16.55 56.82,5.93 57.97,4.78 SM2.5 61.64,7 61.64,9.958 62.126,10.444 RP_M1.4 ; v1(60.81,54.07) 67.09,54.07 68.127,53.033 UM2.206@68.127,50.813
  Bottom Layer w0.254: v1(60.75,20.64) 60.91,20.64 v1@60.85,20.7 ; v1(60.81,54.07) 61.2,54.07 v1@60.85,53.72
  Bottom Layer w0.5: v1@60.85,20.7 v1@60.85,53.72
NetUM1_1: UM1.1 UM2.92 | length 15.8
  Top Layer w0.254: UM2.92 86.65,16.73 88.44,14.94 v1@89.825,14.94 ; UM1.1 v1@93.035,14.955
  Bottom Layer w0.254: v1(89.8,14.97) v1(93.05,14.97)
NetUM1_3: UM1.3 UM2.104 | length 10.8
  Top Layer w0.254: UM1.3 91.735,17.705 92.65,18.62 UM2.104
pads on no net: JTAG_M1.6 JTAG_M1.8 UM1.2 UM1.9 UM1.12 UM1.13 UM1.14 UM1.15 UM1.16 UM2.2 UM2.3 UM2.4 UM2.5 UM2.7 UM2.9 UM2.10 UM2.11 UM2.12 UM2.13 UM2.15 UM2.16 UM2.18 UM2.19 UM2.20 UM2.21 UM2.22 UM2.24 UM2.26 UM2.27 UM2.28 UM2.29 UM2.31 UM2.33 UM2.34 UM2.35 UM2.36 UM2.37 UM2.39 UM2.40 UM2.42 UM2.43 UM2.44 UM2.45 UM2.46 UM2.48 UM2.50 UM2.51 UM2.52 UM2.57 UM2.58 UM2.61 UM2.62 UM2.63 UM2.64 UM2.65 UM2.67 UM2.68 UM2.71 UM2.72 UM2.74 UM2.76 UM2.77 UM2.78 UM2.79 UM2.81 UM2.85 UM2.86 UM2.87 UM2.90 UM2.93 UM2.94 UM2.95 UM2.96 UM2.97 UM2.100 UM2.101 UM2.102 UM2.106 UM2.107 UM2.108 UM2.109 UM2.111 UM2.113 UM2.114 UM2.115 UM2.116 UM2.117 UM2.119 UM2.120 UM2.122 UM2.123 UM2.124 UM2.125 UM2.126 UM2.128 UM2.130 UM2.131 UM2.132 UM2.133 UM2.135 UM2.137 UM2.138 UM2.139 UM2.140 UM2.141 UM2.143 UM2.144 UM2.146 UM2.147 UM2.148 UM2.149 UM2.150 UM2.152 UM2.154 UM2.155 UM2.156 UM2.161 UM2.162 UM2.165 UM2.166 UM2.167 UM2.168 UM2.169 UM2.171 UM2.172 UM2.175 UM2.176 UM2.178 UM2.180 UM2.181 UM2.182 UM2.183 UM2.184 UM2.185 UM2.187 UM2.189 UM2.190 UM2.191 UM2.194 UM2.196 UM2.197 UM2.198 UM2.199 UM2.200 UM2.203 UM2.204 UM2.205 XTAL_M1.1
copper on no net: | length 0.4
  Top Layer w0.254: v1@82.64,41.98 v1@82.71,41.91
  Bottom Layer w0.254: v1(77.35,41.81) v1@77.59,42.05
  other v1: 77.49,30.09 82.62,30.09 75.95,36.06 83.53,36.06 82.72,41.8

## Keep-outs
Keep-Out Layer:
  lines w0.254: 0,0 134.87,0 134.87,80 0,80 0,0

## Text inside footprints (layer, text, board x,y; h text height)
JTAG_M1: Top Overlay "10" at 103.616,6.208 h1.27 r180; Top Overlay "9" at 103.616,8.748 h1.27 r180; Top Overlay "1" at 117.332,8.748 h1.27 r180; Top Overlay "2" at 117.84,6.208 h1.27 r180